# Altium PCB LED灯带-2835-30B-全限流-加定位点.PcbDoc (part 2 of 3)
Units mm, origin at the board's own origin, x right, y up, seen from the top; angles counter-clockwise.
Board outline 500 x 8 mm, 2 copper layers (Top Layer, Bottom Layer); 91 components, 0 nets, 184 pads, 0 vias.
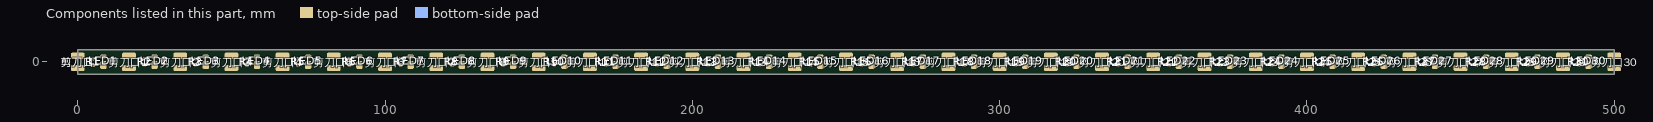
[diagram p2: the components of this part, seen from the top]

## Other copper
Top Layer:
  rectangle: 13.716,0.635 13.843,0.889
  rectangle: 13.462,1.397 14.224,2.921
  rectangle: 13.208,1.905 14.097,2.54
  rectangle: 10.541,1.778 11.43,2.794
  rectangle: 2.921,2.159 10.16,3.683
  region: 7.344,2.064 6.99,2.418 6.731,2.159 7.085,1.805
  rectangle: 6.985,1.143 7.366,2.54
  rectangle: 3.048,0.889 3.683,2.667
  region: 6.255,-3.153 6.609,-2.799 6.35,-2.54 5.996,-2.894
  rectangle: 5.842,-3.048 10.827,-2.767
  rectangle: 10.922,-3.175 11.557,-0.889
  region: 10.827,-3.026 11.181,-2.672 10.922,-2.413 10.568,-2.767
  rectangle: 0.259,-3.683 11.303,-2.794
  rectangle: 11.181,-3.683 16.764,-0.63
  region: 11.535,-0.984 11.181,-0.63 10.922,-0.889 11.276,-1.243
  region: 5.996,-1.243 6.35,-0.889 5.842,-0.381 5.488,-0.735
  region: 4.223,-0.994 4.577,-0.64 4.318,-0.381 3.964,-0.735
  rectangle: 0.259,-3.683 6.35,-0.889
  region: 3.329,2.386 3.683,2.032 3.942,2.291 3.588,2.645
  region: 3.07,0.984 3.424,0.63 3.683,0.889 3.329,1.243
  rectangle: 7.112,1.016 10.922,3.741
  rectangle: 0.259,2.286 16.637,3.741
  rectangle: 0.259,0.635 3.429,3.741
  rectangle: 10.033,-2.159 10.414,0.249
  region: 9.806,-2.059 10.16,-2.413 10.419,-2.154 10.065,-1.8
  region: 10.065,-0.105 10.419,0.249 10.16,0.508 9.806,0.154
  region: 7.339,-1.932 6.985,-2.286 7.112,-2.413 7.466,-2.059
  rectangle: 6.604,-0.254 8.001,0.508
  region: 6.001,1.165 6.355,1.519 6.096,1.778 5.742,1.424
  rectangle: 5.461,0.381 6.35,1.524
  rectangle: 5.789,0.762 5.969,1.778
  rectangle: 5.969,0.762 6.096,1.778
  rectangle: 0,0.635 3.429,3.741
  rectangle: 0,-3.683 4.318,-0.635
  rectangle: 13.462,-3.683 16.764,-0.635
  rectangle: 13.843,0.635 16.764,3.741
  rectangle: 6.985,-2.286 7.747,0.318
  rectangle: 7.112,-2.413 10.155,0.508
  region: 7.339,1.497 6.985,1.143 7.112,1.016 7.466,1.37
  rectangle: 7.112,1.016 10.414,2.286
  rectangle: 7.097,1.031 10.16,2.921
  region: 7.112,-0.762 7.62,-0.254 6.223,1.143 5.715,0.635
  rectangle: 4.191,0.508 4.672,1.651
  region: 4.45,1.392 4.577,1.519 4.318,1.778 4.191,1.651
  region: 4.672,0.989 4.191,0.508 4.318,0.381 4.799,0.862
  region: 4.223,-0.994 4.577,-0.64 4.318,-0.381 3.964,-0.735
  rectangle: 4.318,0.508 5.969,1.778
  rectangle: 4.318,0.381 5.789,0.762
  rectangle: 4.318,-3.048 5.842,-0.381
  region: 24.011,2.064 23.656,2.418 23.398,2.159 23.752,1.805
  rectangle: 23.652,1.143 24.033,2.54
  rectangle: 19.715,0.889 20.35,2.667
  region: 22.921,-3.153 23.275,-2.799 23.017,-2.54 22.663,-2.894
  rectangle: 22.509,-3.048 27.493,-2.767
  rectangle: 27.589,-3.175 28.224,-0.889
  region: 27.493,-3.026 27.847,-2.672 27.589,-2.413 27.235,-2.767
  rectangle: 16.926,-3.683 27.97,-2.794
  rectangle: 27.847,-3.683 33.431,-0.63
  region: 28.202,-0.984 27.847,-0.63 27.589,-0.889 27.943,-1.243
  region: 22.663,-1.243 23.017,-0.889 22.509,-0.381 22.155,-0.735
  region: 20.889,-0.994 21.243,-0.64 20.985,-0.381 20.631,-0.735
  rectangle: 16.926,-3.683 23.017,-0.889
  region: 19.996,2.386 20.35,2.032 20.608,2.291 20.254,2.645
  region: 26.763,1.333 27.462,0.635 27.72,0.894 27.022,1.592
  region: 19.737,0.984 20.091,0.63 20.35,0.889 19.996,1.243
  rectangle: 23.779,1.016 27.462,3.741
  rectangle: 27.462,0.635 33.304,3.741
  rectangle: 16.926,2.159 33.304,3.741
  rectangle: 16.926,0.635 20.096,3.741
  rectangle: 26.7,-2.159 27.081,0.249
  region: 26.473,-2.059 26.827,-2.413 27.085,-2.154 26.731,-1.8
  region: 26.731,-0.105 27.085,0.249 26.827,0.508 26.473,0.154
  region: 24.006,-1.932 23.652,-2.286 23.779,-2.413 24.133,-2.059
  rectangle: 23.271,-0.254 24.668,0.508
  region: 22.667,1.165 23.021,1.519 22.763,1.778 22.409,1.424
  rectangle: 22.128,0.381 23.017,1.524
  rectangle: 22.456,0.762 22.636,1.778
  rectangle: 22.636,0.762 22.763,1.778
  rectangle: 16.667,0.635 20.096,3.741
  rectangle: 16.667,-3.683 20.985,-0.635
  rectangle: 30.129,-3.683 33.431,-0.635
  rectangle: 30.51,0.635 33.431,3.741
  rectangle: 23.652,-2.286 24.414,0.318
  rectangle: 23.779,-2.413 26.822,0.508
  region: 24.006,1.497 23.652,1.143 23.779,1.016 24.133,1.37
  rectangle: 23.779,1.016 27.081,2.286
  rectangle: 23.763,1.031 26.827,2.921
  region: 23.779,-0.762 24.287,-0.254 22.89,1.143 22.382,0.635
  rectangle: 20.858,0.508 21.339,1.651
  region: 21.116,1.392 21.243,1.519 20.985,1.778 20.858,1.651
  region: 21.339,0.989 20.858,0.508 20.985,0.381 21.466,0.862
  region: 20.889,-0.994 21.243,-0.64 20.985,-0.381 20.631,-0.735
  rectangle: 20.985,0.508 22.636,1.778
  rectangle: 20.985,0.381 22.456,0.762
  rectangle: 20.985,-3.048 22.509,-0.381
  region: 40.677,2.064 40.323,2.418 40.064,2.159 40.418,1.805
  rectangle: 40.318,1.143 40.699,2.54
  rectangle: 36.381,0.889 37.016,2.667
  region: 39.588,-3.153 39.942,-2.799 39.683,-2.54 39.329,-2.894
  rectangle: 39.175,-3.048 44.16,-2.767
  rectangle: 44.255,-3.175 44.89,-0.889
  region: 44.16,-3.026 44.514,-2.672 44.255,-2.413 43.901,-2.767
  rectangle: 33.592,-3.683 44.636,-2.794
  rectangle: 44.514,-3.683 50.097,-0.63
  region: 44.868,-0.984 44.514,-0.63 44.255,-0.889 44.609,-1.243
  region: 39.329,-1.243 39.683,-0.889 39.175,-0.381 38.821,-0.735
  region: 37.556,-0.994 37.91,-0.64 37.651,-0.381 37.297,-0.735
  rectangle: 33.592,-3.683 39.683,-0.889
  region: 36.662,2.386 37.016,2.032 37.275,2.291 36.921,2.645
  region: 43.43,1.333 44.128,0.635 44.387,0.894 43.689,1.592
  region: 36.403,0.984 36.758,0.63 37.016,0.889 36.662,1.243
  rectangle: 40.445,1.016 44.128,3.741
  rectangle: 44.128,0.635 49.97,3.741
  rectangle: 33.592,2.159 49.97,3.741
  rectangle: 33.592,0.635 36.762,3.741
  rectangle: 43.366,-2.159 43.747,0.249
  region: 43.139,-2.059 43.493,-2.413 43.752,-2.154 43.398,-1.8
  region: 43.398,-0.105 43.752,0.249 43.493,0.508 43.139,0.154
  region: 40.672,-1.932 40.318,-2.286 40.445,-2.413 40.799,-2.059
  rectangle: 39.937,-0.254 41.334,0.508
  region: 39.334,1.165 39.688,1.519 39.429,1.778 39.075,1.424
  rectangle: 38.794,0.381 39.683,1.524
  rectangle: 39.122,0.762 39.302,1.778
  rectangle: 39.302,0.762 39.429,1.778
  rectangle: 33.333,0.635 36.762,3.741
  rectangle: 33.333,-3.683 37.651,-0.635
  rectangle: 46.795,-3.683 50.097,-0.635
  rectangle: 47.176,0.635 50.097,3.741
  rectangle: 40.318,-2.286 41.08,0.318
  rectangle: 40.445,-2.413 43.489,0.508
  region: 40.673,1.497 40.318,1.143 40.445,1.016 40.8,1.37
  rectangle: 40.445,1.016 43.747,2.286
  rectangle: 40.43,1.031 43.493,2.921
  region: 40.445,-0.762 40.953,-0.254 39.556,1.143 39.048,0.635
  rectangle: 37.524,0.508 38.005,1.651
  region: 37.783,1.392 37.91,1.519 37.651,1.778 37.524,1.651
  region: 38.005,0.989 37.524,0.508 37.651,0.381 38.132,0.862
  region: 37.556,-0.994 37.91,-0.64 37.651,-0.381 37.297,-0.735
  rectangle: 37.651,0.508 39.302,1.778
  rectangle: 37.651,0.381 39.122,0.762
  rectangle: 37.651,-3.048 39.175,-0.381
  region: 57.344,2.064 56.99,2.418 56.731,2.159 57.085,1.805
  rectangle: 56.985,1.143 57.366,2.54
  rectangle: 53.048,0.889 53.683,2.667
  region: 56.255,-3.153 56.609,-2.799 56.35,-2.54 55.996,-2.894
  rectangle: 55.842,-3.048 60.827,-2.767
  rectangle: 60.922,-3.175 61.557,-0.889
  region: 60.827,-3.026 61.181,-2.672 60.922,-2.413 60.568,-2.767
  rectangle: 50.259,-3.683 61.303,-2.794
  rectangle: 61.181,-3.683 66.764,-0.63
  region: 61.535,-0.984 61.181,-0.63 60.922,-0.889 61.276,-1.243
  region: 55.996,-1.243 56.35,-0.889 55.842,-0.381 55.488,-0.735
  region: 54.223,-0.994 54.577,-0.64 54.318,-0.381 53.964,-0.735
  rectangle: 50.259,-3.683 56.35,-0.889
  region: 53.329,2.386 53.683,2.032 53.942,2.291 53.588,2.645
  region: 60.097,1.333 60.795,0.635 61.054,0.894 60.355,1.592
  region: 53.07,0.984 53.424,0.63 53.683,0.889 53.329,1.243
  rectangle: 57.112,1.016 60.795,3.741
  rectangle: 60.795,0.635 66.637,3.741
  rectangle: 50.259,2.159 66.637,3.741
  rectangle: 50.259,0.635 53.429,3.741
  rectangle: 60.033,-2.159 60.414,0.249
  region: 59.806,-2.059 60.16,-2.413 60.419,-2.154 60.065,-1.8
  region: 60.065,-0.105 60.419,0.249 60.16,0.508 59.806,0.154
  region: 57.339,-1.932 56.985,-2.286 57.112,-2.413 57.466,-2.059
  rectangle: 56.604,-0.254 58.001,0.508
  region: 56.001,1.165 56.355,1.519 56.096,1.778 55.742,1.424
  rectangle: 55.461,0.381 56.35,1.524
  rectangle: 55.789,0.762 55.969,1.778
  rectangle: 55.969,0.762 56.096,1.778
  rectangle: 50,0.635 53.429,3.741
  rectangle: 50,-3.683 54.318,-0.635
  rectangle: 63.462,-3.683 66.764,-0.635
  rectangle: 63.843,0.635 66.764,3.741
  rectangle: 56.985,-2.286 57.747,0.318
  rectangle: 57.112,-2.413 60.155,0.508
  region: 57.339,1.497 56.985,1.143 57.112,1.016 57.466,1.37
  rectangle: 57.112,1.016 60.414,2.286
  rectangle: 57.097,1.031 60.16,2.921
  region: 57.112,-0.762 57.62,-0.254 56.223,1.143 55.715,0.635
  rectangle: 54.191,0.508 54.672,1.651
  region: 54.45,1.392 54.577,1.519 54.318,1.778 54.191,1.651
  region: 54.672,0.989 54.191,0.508 54.318,0.381 54.799,0.862
  region: 54.223,-0.994 54.577,-0.64 54.318,-0.381 53.964,-0.735
  rectangle: 54.318,0.508 55.969,1.778
  rectangle: 54.318,0.381 55.789,0.762
  rectangle: 54.318,-3.048 55.842,-0.381
  region: 74.011,2.064 73.656,2.418 73.398,2.159 73.752,1.805
  rectangle: 73.652,1.143 74.033,2.54
  rectangle: 69.715,0.889 70.35,2.667
  region: 72.921,-3.153 73.275,-2.799 73.017,-2.54 72.663,-2.894
  rectangle: 72.509,-3.048 77.493,-2.767
  rectangle: 77.589,-3.175 78.224,-0.889
  region: 77.493,-3.026 77.847,-2.672 77.589,-2.413 77.235,-2.767
  rectangle: 66.926,-3.683 77.97,-2.794
  rectangle: 77.847,-3.683 83.431,-0.63
  region: 78.202,-0.984 77.847,-0.63 77.589,-0.889 77.943,-1.243
  region: 72.663,-1.243 73.017,-0.889 72.509,-0.381 72.155,-0.735
  region: 70.889,-0.994 71.243,-0.64 70.985,-0.381 70.631,-0.735
  rectangle: 66.926,-3.683 73.017,-0.889
  region: 69.996,2.386 70.35,2.032 70.608,2.291 70.254,2.645
  region: 76.763,1.333 77.462,0.635 77.72,0.894 77.022,1.592
  region: 69.737,0.984 70.091,0.63 70.35,0.889 69.996,1.243
  rectangle: 73.779,1.016 77.462,3.741
  rectangle: 77.462,0.635 83.304,3.741
  rectangle: 66.926,2.159 83.304,3.741
  rectangle: 66.926,0.635 70.096,3.741
  rectangle: 76.7,-2.159 77.081,0.249
  region: 76.473,-2.059 76.827,-2.413 77.085,-2.154 76.731,-1.8
  region: 76.731,-0.105 77.085,0.249 76.827,0.508 76.473,0.154
  region: 74.006,-1.932 73.652,-2.286 73.779,-2.413 74.133,-2.059
  rectangle: 73.271,-0.254 74.668,0.508
  region: 72.667,1.165 73.021,1.519 72.763,1.778 72.409,1.424
  rectangle: 72.128,0.381 73.017,1.524
  rectangle: 72.456,0.762 72.636,1.778
  rectangle: 72.636,0.762 72.763,1.778
  rectangle: 66.667,0.635 70.096,3.741
  rectangle: 66.667,-3.683 70.985,-0.635
  rectangle: 80.129,-3.683 83.431,-0.635
  rectangle: 80.51,0.635 83.431,3.741
  rectangle: 73.652,-2.286 74.414,0.318
  rectangle: 73.779,-2.413 76.822,0.508
  region: 74.006,1.497 73.652,1.143 73.779,1.016 74.133,1.37
  rectangle: 73.779,1.016 77.081,2.286
  rectangle: 73.763,1.031 76.827,2.921
  region: 73.779,-0.762 74.287,-0.254 72.89,1.143 72.382,0.635
  rectangle: 70.858,0.508 71.339,1.651
  region: 71.116,1.392 71.243,1.519 70.985,1.778 70.858,1.651
  region: 71.339,0.989 70.858,0.508 70.985,0.381 71.466,0.862
  region: 70.889,-0.994 71.243,-0.64 70.985,-0.381 70.631,-0.735
  rectangle: 70.985,0.508 72.636,1.778
  rectangle: 70.985,0.381 72.456,0.762
  rectangle: 70.985,-3.048 72.509,-0.381
  region: 90.677,2.064 90.323,2.418 90.064,2.159 90.419,1.805
  rectangle: 90.318,1.143 90.699,2.54
  rectangle: 86.381,0.889 87.016,2.667
  region: 89.588,-3.153 89.942,-2.799 89.683,-2.54 89.329,-2.894
  rectangle: 89.175,-3.048 94.16,-2.767
  rectangle: 94.255,-3.175 94.89,-0.889
  region: 94.16,-3.026 94.514,-2.672 94.255,-2.413 93.901,-2.767
  rectangle: 83.592,-3.683 94.636,-2.794
  rectangle: 94.514,-3.683 100.097,-0.63
  region: 94.868,-0.984 94.514,-0.63 94.255,-0.889 94.61,-1.243
  region: 89.329,-1.243 89.683,-0.889 89.175,-0.381 88.821,-0.735
  region: 87.556,-0.994 87.91,-0.64 87.651,-0.381 87.297,-0.735
  rectangle: 83.592,-3.683 89.683,-0.889
  region: 86.662,2.386 87.016,2.032 87.275,2.291 86.921,2.645
  region: 93.43,1.333 94.128,0.635 94.387,0.894 93.689,1.592
  region: 86.403,0.984 86.758,0.63 87.016,0.889 86.662,1.243
  rectangle: 90.445,1.016 94.128,3.741
  rectangle: 94.128,0.635 99.97,3.741
  rectangle: 83.592,2.159 99.97,3.741
  rectangle: 83.592,0.635 86.762,3.741
  rectangle: 93.366,-2.159 93.747,0.249
  region: 93.139,-2.059 93.493,-2.413 93.752,-2.154 93.398,-1.8
  region: 93.398,-0.105 93.752,0.249 93.493,0.508 93.139,0.154
  region: 90.673,-1.932 90.318,-2.286 90.445,-2.413 90.8,-2.059
  rectangle: 89.937,-0.254 91.334,0.508
  region: 89.334,1.165 89.688,1.519 89.429,1.778 89.075,1.424
  rectangle: 88.794,0.381 89.683,1.524
  rectangle: 89.122,0.762 89.302,1.778
  rectangle: 89.302,0.762 89.429,1.778
  rectangle: 83.333,0.635 86.762,3.741
  rectangle: 83.333,-3.683 87.651,-0.635
  rectangle: 96.795,-3.683 100.097,-0.635
  rectangle: 97.176,0.635 100.097,3.741
  rectangle: 90.318,-2.286 91.08,0.318
  rectangle: 90.445,-2.413 93.489,0.508
  region: 90.673,1.497 90.318,1.143 90.445,1.016 90.8,1.37
  rectangle: 90.445,1.016 93.747,2.286
  rectangle: 90.43,1.031 93.493,2.921
  region: 90.445,-0.762 90.953,-0.254 89.556,1.143 89.048,0.635
  rectangle: 87.524,0.508 88.006,1.651
  region: 87.783,1.392 87.91,1.519 87.651,1.778 87.524,1.651
  region: 88.006,0.989 87.524,0.508 87.651,0.381 88.133,0.862
  region: 87.556,-0.994 87.91,-0.64 87.651,-0.381 87.297,-0.735
  rectangle: 87.651,0.508 89.302,1.778
  rectangle: 87.651,0.381 89.122,0.762
  rectangle: 87.651,-3.048 89.175,-0.381
  region: 107.344,2.064 106.99,2.418 106.731,2.159 107.085,1.805
  rectangle: 106.985,1.143 107.366,2.54
  rectangle: 103.048,0.889 103.683,2.667
  region: 106.255,-3.153 106.609,-2.799 106.35,-2.54 105.996,-2.894
  rectangle: 105.842,-3.048 110.827,-2.767
  rectangle: 110.922,-3.175 111.557,-0.889
  region: 110.827,-3.026 111.181,-2.672 110.922,-2.413 110.568,-2.767
  rectangle: 100.259,-3.683 111.303,-2.794
  rectangle: 111.181,-3.683 116.764,-0.63
  region: 111.535,-0.984 111.181,-0.63 110.922,-0.889 111.276,-1.243
  region: 105.996,-1.243 106.35,-0.889 105.842,-0.381 105.488,-0.735
  region: 104.223,-0.994 104.577,-0.64 104.318,-0.381 103.964,-0.735
  rectangle: 100.259,-3.683 106.35,-0.889
  region: 103.329,2.386 103.683,2.032 103.942,2.291 103.588,2.645
  region: 110.097,1.333 110.795,0.635 111.054,0.894 110.355,1.592
  region: 103.07,0.984 103.424,0.63 103.683,0.889 103.329,1.243
  rectangle: 107.112,1.016 110.795,3.741
  rectangle: 110.795,0.635 116.637,3.741
  rectangle: 100.259,2.159 116.637,3.741
  rectangle: 100.259,0.635 103.429,3.741
  rectangle: 110.033,-2.159 110.414,0.249
  region: 109.806,-2.059 110.16,-2.413 110.419,-2.154 110.065,-1.8
  region: 110.065,-0.105 110.419,0.249 110.16,0.508 109.806,0.154
  region: 107.339,-1.932 106.985,-2.286 107.112,-2.413 107.466,-2.059
  rectangle: 106.604,-0.254 108.001,0.508
  region: 106.001,1.165 106.355,1.519 106.096,1.778 105.742,1.424
  rectangle: 105.461,0.381 106.35,1.524
  rectangle: 105.789,0.762 105.969,1.778
  rectangle: 105.969,0.762 106.096,1.778
  rectangle: 100,0.635 103.429,3.741
  rectangle: 100,-3.683 104.318,-0.635
  rectangle: 113.462,-3.683 116.764,-0.635
  rectangle: 113.843,0.635 116.764,3.741
  rectangle: 106.985,-2.286 107.747,0.318
  rectangle: 107.112,-2.413 110.155,0.508
  region: 107.339,1.497 106.985,1.143 107.112,1.016 107.466,1.37
  rectangle: 107.112,1.016 110.414,2.286
  rectangle: 107.097,1.031 110.16,2.921
  region: 107.112,-0.762 107.62,-0.254 106.223,1.143 105.715,0.635
  rectangle: 104.191,0.508 104.672,1.651
  region: 104.45,1.392 104.577,1.519 104.318,1.778 104.191,1.651
  region: 104.672,0.989 104.191,0.508 104.318,0.381 104.799,0.862
  region: 104.223,-0.994 104.577,-0.64 104.318,-0.381 103.964,-0.735
  rectangle: 104.318,0.508 105.969,1.778
  rectangle: 104.318,0.381 105.789,0.762
  rectangle: 104.318,-3.048 105.842,-0.381
  region: 124.011,2.064 123.656,2.418 123.398,2.159 123.752,1.805
  rectangle: 123.652,1.143 124.033,2.54
  rectangle: 119.715,0.889 120.35,2.667
  region: 122.921,-3.153 123.275,-2.799 123.017,-2.54 122.663,-2.894
  rectangle: 122.509,-3.048 127.493,-2.767
  rectangle: 127.589,-3.175 128.224,-0.889
  region: 127.493,-3.026 127.847,-2.672 127.589,-2.413 127.235,-2.767
  rectangle: 116.926,-3.683 127.97,-2.794
  rectangle: 127.847,-3.683 133.431,-0.63
  region: 128.202,-0.984 127.847,-0.63 127.589,-0.889 127.943,-1.243
  region: 122.663,-1.243 123.017,-0.889 122.509,-0.381 122.155,-0.735
  region: 120.889,-0.994 121.243,-0.64 120.985,-0.381 120.631,-0.735
  rectangle: 116.926,-3.683 123.017,-0.889
  region: 119.996,2.386 120.35,2.032 120.608,2.291 120.254,2.645
  region: 126.763,1.333 127.462,0.635 127.72,0.894 127.022,1.592
  region: 119.737,0.984 120.091,0.63 120.35,0.889 119.996,1.243
  rectangle: 123.779,1.016 127.462,3.741
  rectangle: 127.462,0.635 133.304,3.741
  rectangle: 116.926,2.159 133.304,3.741
  rectangle: 116.926,0.635 120.096,3.741
  rectangle: 126.7,-2.159 127.081,0.249
  region: 126.473,-2.059 126.827,-2.413 127.085,-2.154 126.731,-1.8
  region: 126.731,-0.105 127.085,0.249 126.827,0.508 126.473,0.154
  region: 124.006,-1.932 123.652,-2.286 123.779,-2.413 124.133,-2.059
  rectangle: 123.271,-0.254 124.668,0.508
  region: 122.667,1.165 123.021,1.519 122.763,1.778 122.409,1.424
  rectangle: 122.128,0.381 123.017,1.524
  rectangle: 122.456,0.762 122.636,1.778
  rectangle: 122.636,0.762 122.763,1.778
  rectangle: 116.667,0.635 120.096,3.741
  rectangle: 116.667,-3.683 120.985,-0.635
  rectangle: 130.129,-3.683 133.431,-0.635
  rectangle: 130.51,0.635 133.431,3.741
  rectangle: 123.652,-2.286 124.414,0.318
  rectangle: 123.779,-2.413 126.822,0.508
  region: 124.006,1.497 123.652,1.143 123.779,1.016 124.133,1.37
  rectangle: 123.779,1.016 127.081,2.286
  rectangle: 123.763,1.031 126.827,2.921
  region: 123.779,-0.762 124.287,-0.254 122.89,1.143 122.382,0.635
  rectangle: 120.858,0.508 121.339,1.651
  region: 121.116,1.392 121.243,1.519 120.985,1.778 120.858,1.651
  region: 121.339,0.989 120.858,0.508 120.985,0.381 121.466,0.862
  region: 120.889,-0.994 121.243,-0.64 120.985,-0.381 120.631,-0.735
  rectangle: 120.985,0.508 122.636,1.778
  rectangle: 120.985,0.381 122.456,0.762
  rectangle: 120.985,-3.048 122.509,-0.381
  region: 140.677,2.064 140.323,2.418 140.064,2.159 140.419,1.805
  rectangle: 140.318,1.143 140.699,2.54
  rectangle: 136.381,0.889 137.016,2.667
  region: 139.588,-3.153 139.942,-2.799 139.683,-2.54 139.329,-2.894
  rectangle: 139.175,-3.048 144.16,-2.767
  rectangle: 144.255,-3.175 144.89,-0.889
  region: 144.16,-3.026 144.514,-2.672 144.255,-2.413 143.901,-2.767
  rectangle: 133.592,-3.683 144.636,-2.794
  rectangle: 144.514,-3.683 150.097,-0.63
  region: 144.868,-0.984 144.514,-0.63 144.255,-0.889 144.61,-1.243
  region: 139.329,-1.243 139.683,-0.889 139.175,-0.381 138.821,-0.735
  region: 137.556,-0.994 137.91,-0.64 137.651,-0.381 137.297,-0.735
  rectangle: 133.592,-3.683 139.683,-0.889
  region: 136.662,2.386 137.016,2.032 137.275,2.291 136.921,2.645
  region: 143.43,1.333 144.128,0.635 144.387,0.894 143.689,1.592
  region: 136.403,0.984 136.758,0.63 137.016,0.889 136.662,1.243
  rectangle: 140.445,1.016 144.128,3.741
  rectangle: 144.128,0.635 149.97,3.741
  rectangle: 133.592,2.159 149.97,3.741
  rectangle: 133.592,0.635 136.762,3.741
  rectangle: 143.366,-2.159 143.747,0.249
  region: 143.139,-2.059 143.493,-2.413 143.752,-2.154 143.398,-1.8
  region: 143.398,-0.105 143.752,0.249 143.493,0.508 143.139,0.154
  region: 140.673,-1.932 140.318,-2.286 140.445,-2.413 140.8,-2.059
  rectangle: 139.937,-0.254 141.334,0.508
  region: 139.334,1.165 139.688,1.519 139.429,1.778 139.075,1.424
  rectangle: 138.794,0.381 139.683,1.524
  rectangle: 139.122,0.762 139.302,1.778
  rectangle: 139.302,0.762 139.429,1.778
  rectangle: 133.333,0.635 136.762,3.741
  rectangle: 133.333,-3.683 137.651,-0.635
  rectangle: 146.795,-3.683 150.097,-0.635
  rectangle: 147.176,0.635 150.097,3.741
  rectangle: 140.318,-2.286 141.08,0.318
  rectangle: 140.445,-2.413 143.489,0.508
  region: 140.673,1.497 140.318,1.143 140.445,1.016 140.8,1.37
  rectangle: 140.445,1.016 143.747,2.286
  rectangle: 140.43,1.031 143.493,2.921
  region: 140.445,-0.762 140.953,-0.254 139.556,1.143 139.048,0.635
  rectangle: 137.524,0.508 138.006,1.651
  region: 137.783,1.392 137.91,1.519 137.651,1.778 137.524,1.651
  region: 138.006,0.989 137.524,0.508 137.651,0.381 138.133,0.862
  region: 137.556,-0.994 137.91,-0.64 137.651,-0.381 137.297,-0.735
  rectangle: 137.651,0.508 139.302,1.778
  rectangle: 137.651,0.381 139.122,0.762
  rectangle: 137.651,-3.048 139.175,-0.381
  region: 157.344,2.064 156.99,2.418 156.731,2.159 157.085,1.805
  rectangle: 156.985,1.143 157.366,2.54
  rectangle: 153.048,0.889 153.683,2.667
  region: 156.255,-3.153 156.609,-2.799 156.35,-2.54 155.996,-2.894
  rectangle: 155.842,-3.048 160.827,-2.767
  rectangle: 160.922,-3.175 161.557,-0.889
  region: 160.827,-3.026 161.181,-2.672 160.922,-2.413 160.568,-2.767
  rectangle: 150.259,-3.683 161.303,-2.794
  rectangle: 161.181,-3.683 166.764,-0.63
  region: 161.535,-0.984 161.181,-0.63 160.922,-0.889 161.276,-1.243
  region: 155.996,-1.243 156.35,-0.889 155.842,-0.381 155.488,-0.735
  region: 154.223,-0.994 154.577,-0.64 154.318,-0.381 153.964,-0.735
  rectangle: 150.259,-3.683 156.35,-0.889
  region: 153.329,2.386 153.683,2.032 153.942,2.291 153.588,2.645
  region: 160.097,1.333 160.795,0.635 161.054,0.894 160.355,1.592
  region: 153.07,0.984 153.424,0.63 153.683,0.889 153.329,1.243
  rectangle: 157.112,1.016 160.795,3.741
  rectangle: 160.795,0.635 166.637,3.741
  rectangle: 150.259,2.159 166.637,3.741
  rectangle: 150.259,0.635 153.429,3.741
  rectangle: 160.033,-2.159 160.414,0.249
  region: 159.806,-2.059 160.16,-2.413 160.419,-2.154 160.065,-1.8
  region: 160.065,-0.105 160.419,0.249 160.16,0.508 159.806,0.154
  region: 157.339,-1.932 156.985,-2.286 157.112,-2.413 157.466,-2.059
  rectangle: 156.604,-0.254 158.001,0.508
  region: 156.001,1.165 156.355,1.519 156.096,1.778 155.742,1.424
  rectangle: 155.461,0.381 156.35,1.524
  rectangle: 155.789,0.762 155.969,1.778
  rectangle: 155.969,0.762 156.096,1.778
  rectangle: 150,0.635 153.429,3.741
  rectangle: 150,-3.683 154.318,-0.635
  rectangle: 163.462,-3.683 166.764,-0.635
  rectangle: 163.843,0.635 166.764,3.741
  rectangle: 156.985,-2.286 157.747,0.318
  rectangle: 157.112,-2.413 160.155,0.508
  region: 157.339,1.497 156.985,1.143 157.112,1.016 157.466,1.37
  rectangle: 157.112,1.016 160.414,2.286
  rectangle: 157.097,1.031 160.16,2.921
  region: 157.112,-0.762 157.62,-0.254 156.223,1.143 155.715,0.635
  rectangle: 154.191,0.508 154.672,1.651
  region: 154.45,1.392 154.577,1.519 154.318,1.778 154.191,1.651
  region: 154.672,0.989 154.191,0.508 154.318,0.381 154.799,0.862
  region: 154.223,-0.994 154.577,-0.64 154.318,-0.381 153.964,-0.735
  rectangle: 154.318,0.508 155.969,1.778
  rectangle: 154.318,0.381 155.789,0.762
  rectangle: 154.318,-3.048 155.842,-0.381
  region: 174.011,2.064 173.657,2.418 173.398,2.159 173.752,1.805
  rectangle: 173.652,1.143 174.033,2.54
  rectangle: 169.715,0.889 170.35,2.667
  region: 172.921,-3.153 173.276,-2.799 173.017,-2.54 172.663,-2.894
  rectangle: 172.509,-3.048 177.493,-2.767
  rectangle: 177.589,-3.175 178.224,-0.889
  region: 177.493,-3.026 177.848,-2.672 177.589,-2.413 177.235,-2.767
  rectangle: 166.926,-3.683 177.97,-2.794
  rectangle: 177.848,-3.683 183.431,-0.63
  region: 178.202,-0.984 177.848,-0.63 177.589,-0.889 177.943,-1.243
  region: 172.663,-1.243 173.017,-0.889 172.509,-0.381 172.155,-0.735
  region: 170.889,-0.994 171.244,-0.64 170.985,-0.381 170.631,-0.735
  rectangle: 166.926,-3.683 173.017,-0.889
  region: 169.996,2.386 170.35,2.032 170.609,2.291 170.254,2.645
  region: 176.763,1.333 177.462,0.635 177.72,0.894 177.022,1.592
  region: 169.737,0.984 170.091,0.63 170.35,0.889 169.996,1.243
  rectangle: 173.779,1.016 177.462,3.741
  rectangle: 177.462,0.635 183.304,3.741
  rectangle: 166.926,2.159 183.304,3.741
  rectangle: 166.926,0.635 170.096,3.741
  rectangle: 176.7,-2.159 177.081,0.249
  region: 176.473,-2.059 176.827,-2.413 177.086,-2.154 176.731,-1.8
  region: 176.731,-0.105 177.086,0.249 176.827,0.508 176.473,0.154
  region: 174.006,-1.932 173.652,-2.286 173.779,-2.413 174.133,-2.059
  rectangle: 173.271,-0.254 174.668,0.508
  region: 172.667,1.165 173.022,1.519 172.763,1.778 172.409,1.424
  rectangle: 172.128,0.381 173.017,1.524
  rectangle: 172.456,0.762 172.636,1.778
  rectangle: 172.636,0.762 172.763,1.778
  rectangle: 166.667,0.635 170.096,3.741
  rectangle: 166.667,-3.683 170.985,-0.635
  rectangle: 180.129,-3.683 183.431,-0.635
  rectangle: 180.51,0.635 183.431,3.741
  rectangle: 173.652,-2.286 174.414,0.318
  rectangle: 173.779,-2.413 176.822,0.508
  region: 174.006,1.497 173.652,1.143 173.779,1.016 174.133,1.37
  rectangle: 173.779,1.016 177.081,2.286
  rectangle: 173.763,1.031 176.827,2.921
  region: 173.779,-0.762 174.287,-0.254 172.89,1.143 172.382,0.635
  rectangle: 170.858,0.508 171.339,1.651
  region: 171.117,1.392 171.244,1.519 170.985,1.778 170.858,1.651
  region: 171.339,0.989 170.858,0.508 170.985,0.381 171.466,0.862
  region: 170.889,-0.994 171.244,-0.64 170.985,-0.381 170.631,-0.735
  rectangle: 170.985,0.508 172.636,1.778
  rectangle: 170.985,0.381 172.456,0.762
  rectangle: 170.985,-3.048 172.509,-0.381
  region: 190.677,2.064 190.323,2.418 190.064,2.159 190.419,1.805
  rectangle: 190.318,1.143 190.699,2.54
  rectangle: 186.381,0.889 187.016,2.667
  region: 189.588,-3.153 189.942,-2.799 189.683,-2.54 189.329,-2.894
  rectangle: 189.175,-3.048 194.16,-2.767
  rectangle: 194.255,-3.175 194.89,-0.889
  region: 194.16,-3.026 194.514,-2.672 194.255,-2.413 193.901,-2.767
  rectangle: 183.592,-3.683 194.636,-2.794
  rectangle: 194.514,-3.683 200.097,-0.63
  region: 194.868,-0.984 194.514,-0.63 194.255,-0.889 194.61,-1.243
  region: 189.329,-1.243 189.683,-0.889 189.175,-0.381 188.821,-0.735
  region: 187.556,-0.994 187.91,-0.64 187.651,-0.381 187.297,-0.735
  rectangle: 183.592,-3.683 189.683,-0.889
  region: 186.662,2.386 187.016,2.032 187.275,2.291 186.921,2.645
  region: 193.43,1.333 194.128,0.635 194.387,0.894 193.689,1.592
  region: 186.403,0.984 186.758,0.63 187.016,0.889 186.662,1.243
  rectangle: 190.445,1.016 194.128,3.741
  rectangle: 194.128,0.635 199.97,3.741
  rectangle: 183.592,2.159 199.97,3.741
  rectangle: 183.592,0.635 186.762,3.741
  rectangle: 193.366,-2.159 193.747,0.249
  region: 193.139,-2.059 193.493,-2.413 193.752,-2.154 193.398,-1.8
  region: 193.398,-0.105 193.752,0.249 193.493,0.508 193.139,0.154
  region: 190.673,-1.932 190.318,-2.286 190.445,-2.413 190.8,-2.059
  rectangle: 189.937,-0.254 191.334,0.508
  region: 189.334,1.165 189.688,1.519 189.429,1.778 189.075,1.424
  rectangle: 188.794,0.381 189.683,1.524
  rectangle: 189.122,0.762 189.302,1.778
  rectangle: 189.302,0.762 189.429,1.778
  rectangle: 183.333,0.635 186.762,3.741
  rectangle: 183.333,-3.683 187.651,-0.635
  rectangle: 196.795,-3.683 200.097,-0.635
  rectangle: 197.176,0.635 200.097,3.741
  rectangle: 190.318,-2.286 191.08,0.318
  rectangle: 190.445,-2.413 193.489,0.508
  region: 190.673,1.497 190.318,1.143 190.445,1.016 190.8,1.37
  rectangle: 190.445,1.016 193.747,2.286
  rectangle: 190.43,1.031 193.493,2.921
  region: 190.445,-0.762 190.953,-0.254 189.556,1.143 189.048,0.635
  rectangle: 187.524,0.508 188.006,1.651
  region: 187.783,1.392 187.91,1.519 187.651,1.778 187.524,1.651
  region: 188.006,0.989 187.524,0.508 187.651,0.381 188.133,0.862
  region: 187.556,-0.994 187.91,-0.64 187.651,-0.381 187.297,-0.735
  rectangle: 187.651,0.508 189.302,1.778
  rectangle: 187.651,0.381 189.122,0.762
  rectangle: 187.651,-3.048 189.175,-0.381
  region: 207.344,2.064 206.99,2.418 206.731,2.159 207.085,1.805
  rectangle: 206.985,1.143 207.366,2.54
  rectangle: 203.048,0.889 203.683,2.667
  region: 206.255,-3.153 206.609,-2.799 206.35,-2.54 205.996,-2.894
  rectangle: 205.842,-3.048 210.827,-2.767
  rectangle: 210.922,-3.175 211.557,-0.889
  region: 210.827,-3.026 211.181,-2.672 210.922,-2.413 210.568,-2.767
  rectangle: 200.259,-3.683 211.303,-2.794
  rectangle: 211.181,-3.683 216.764,-0.63
  region: 211.535,-0.984 211.181,-0.63 210.922,-0.889 211.276,-1.243
  region: 205.996,-1.243 206.35,-0.889 205.842,-0.381 205.488,-0.735
  region: 204.223,-0.994 204.577,-0.64 204.318,-0.381 203.964,-0.735
  rectangle: 200.259,-3.683 206.35,-0.889
  region: 203.329,2.386 203.683,2.032 203.942,2.291 203.588,2.645
  region: 210.097,1.333 210.795,0.635 211.054,0.894 210.355,1.592
  region: 203.07,0.984 203.424,0.63 203.683,0.889 203.329,1.243
  rectangle: 207.112,1.016 210.795,3.741
  rectangle: 210.795,0.635 216.637,3.741
  rectangle: 200.259,2.159 216.637,3.741
  rectangle: 200.259,0.635 203.429,3.741
  rectangle: 210.033,-2.159 210.414,0.249
  region: 209.806,-2.059 210.16,-2.413 210.419,-2.154 210.065,-1.8
  region: 210.065,-0.105 210.419,0.249 210.16,0.508 209.806,0.154
  region: 207.339,-1.932 206.985,-2.286 207.112,-2.413 207.466,-2.059
  rectangle: 206.604,-0.254 208.001,0.508
  region: 206.001,1.165 206.355,1.519 206.096,1.778 205.742,1.424
  rectangle: 205.461,0.381 206.35,1.524
  rectangle: 205.789,0.762 205.969,1.778
  rectangle: 205.969,0.762 206.096,1.778
  rectangle: 200,0.635 203.429,3.741
  rectangle: 200,-3.683 204.318,-0.635
  rectangle: 213.462,-3.683 216.764,-0.635
  rectangle: 213.843,0.635 216.764,3.741
  rectangle: 206.985,-2.286 207.747,0.318
  rectangle: 207.112,-2.413 210.155,0.508
  region: 207.339,1.497 206.985,1.143 207.112,1.016 207.466,1.37
  rectangle: 207.112,1.016 210.414,2.286
  rectangle: 207.097,1.031 210.16,2.921
  region: 207.112,-0.762 207.62,-0.254 206.223,1.143 205.715,0.635
  rectangle: 204.191,0.508 204.672,1.651
  region: 204.45,1.392 204.577,1.519 204.318,1.778 204.191,1.651
  region: 204.672,0.989 204.191,0.508 204.318,0.381 204.799,0.862
  region: 204.223,-0.994 204.577,-0.64 204.318,-0.381 203.964,-0.735
  rectangle: 204.318,0.508 205.969,1.778
  rectangle: 204.318,0.381 205.789,0.762
  rectangle: 204.318,-3.048 205.842,-0.381
  region: 224.011,2.064 223.657,2.418 223.398,2.159 223.752,1.805
  rectangle: 223.652,1.143 224.033,2.54
  rectangle: 219.715,0.889 220.35,2.667
  region: 222.921,-3.153 223.276,-2.799 223.017,-2.54 222.663,-2.894
  rectangle: 222.509,-3.048 227.493,-2.767
  rectangle: 227.589,-3.175 228.224,-0.889
  region: 227.493,-3.026 227.848,-2.672 227.589,-2.413 227.235,-2.767
  rectangle: 216.926,-3.683 227.97,-2.794
  rectangle: 227.848,-3.683 233.431,-0.63
  region: 228.202,-0.984 227.848,-0.63 227.589,-0.889 227.943,-1.243
  region: 222.663,-1.243 223.017,-0.889 222.509,-0.381 222.155,-0.735
  region: 220.889,-0.994 221.244,-0.64 220.985,-0.381 220.631,-0.735
  rectangle: 216.926,-3.683 223.017,-0.889
  region: 219.996,2.386 220.35,2.032 220.609,2.291 220.254,2.645
  region: 226.763,1.333 227.462,0.635 227.721,0.894 227.022,1.592
  region: 219.737,0.984 220.091,0.63 220.35,0.889 219.996,1.243
  rectangle: 223.779,1.016 227.462,3.741
  rectangle: 227.462,0.635 233.304,3.741
  rectangle: 216.926,2.159 233.304,3.741
  rectangle: 216.926,0.635 220.096,3.741
  rectangle: 226.7,-2.159 227.081,0.249
  region: 226.473,-2.059 226.827,-2.413 227.086,-2.154 226.731,-1.8
  region: 226.731,-0.105 227.086,0.249 226.827,0.508 226.473,0.154
  region: 224.006,-1.932 223.652,-2.286 223.779,-2.413 224.133,-2.059
  rectangle: 223.271,-0.254 224.668,0.508
  region: 222.667,1.165 223.022,1.519 222.763,1.778 222.409,1.424
  rectangle: 222.128,0.381 223.017,1.524
  rectangle: 222.456,0.762 222.636,1.778
  rectangle: 222.636,0.762 222.763,1.778
  rectangle: 216.667,0.635 220.096,3.741
  rectangle: 216.667,-3.683 220.985,-0.635
  rectangle: 230.129,-3.683 233.431,-0.635
  rectangle: 230.51,0.635 233.431,3.741
  rectangle: 223.652,-2.286 224.414,0.318
  rectangle: 223.779,-2.413 226.822,0.508
  region: 224.006,1.497 223.652,1.143 223.779,1.016 224.133,1.37
  rectangle: 223.779,1.016 227.081,2.286
  rectangle: 223.763,1.031 226.827,2.921
  region: 223.779,-0.762 224.287,-0.254 222.89,1.143 222.382,0.635
  rectangle: 220.858,0.508 221.339,1.651
  region: 221.117,1.392 221.244,1.519 220.985,1.778 220.858,1.651
  region: 221.339,0.989 220.858,0.508 220.985,0.381 221.466,0.862
  region: 220.889,-0.994 221.244,-0.64 220.985,-0.381 220.631,-0.735
  rectangle: 220.985,0.508 222.636,1.778
  rectangle: 220.985,0.381 222.456,0.762
  rectangle: 220.985,-3.048 222.509,-0.381
  region: 240.677,2.064 240.323,2.418 240.064,2.159 240.419,1.805
  rectangle: 240.318,1.143 240.699,2.54
  rectangle: 236.381,0.889 237.016,2.667
  region: 239.588,-3.153 239.942,-2.799 239.683,-2.54 239.329,-2.894
  rectangle: 239.175,-3.048 244.16,-2.767
  rectangle: 244.255,-3.175 244.89,-0.889
  region: 244.16,-3.026 244.514,-2.672 244.255,-2.413 243.901,-2.767
  rectangle: 233.592,-3.683 244.636,-2.794
  rectangle: 244.514,-3.683 250.097,-0.63
  region: 244.868,-0.984 244.514,-0.63 244.255,-0.889 244.61,-1.243
  region: 239.329,-1.243 239.683,-0.889 239.175,-0.381 238.821,-0.735
  region: 237.556,-0.994 237.91,-0.64 237.651,-0.381 237.297,-0.735
  rectangle: 233.592,-3.683 239.683,-0.889
  region: 236.662,2.386 237.016,2.032 237.275,2.291 236.921,2.645
  region: 243.43,1.333 244.128,0.635 244.387,0.894 243.689,1.592
  region: 236.403,0.984 236.758,0.63 237.016,0.889 236.662,1.243
  rectangle: 240.445,1.016 244.128,3.741
  rectangle: 244.128,0.635 249.97,3.741
  rectangle: 233.592,2.159 249.97,3.741
  rectangle: 233.592,0.635 236.762,3.741
  rectangle: 243.366,-2.159 243.747,0.249
  region: 243.139,-2.059 243.493,-2.413 243.752,-2.154 243.398,-1.8
  region: 243.398,-0.105 243.752,0.249 243.493,0.508 243.139,0.154
  region: 240.673,-1.932 240.318,-2.286 240.445,-2.413 240.8,-2.059
  rectangle: 239.937,-0.254 241.334,0.508
  region: 239.334,1.165 239.688,1.519 239.429,1.778 239.075,1.424
  rectangle: 238.794,0.381 239.683,1.524
  rectangle: 239.122,0.762 239.302,1.778
  rectangle: 239.302,0.762 239.429,1.778
  rectangle: 233.333,0.635 236.762,3.741
  rectangle: 233.333,-3.683 237.651,-0.635
  rectangle: 246.795,-3.683 250.097,-0.635
  rectangle: 247.176,0.635 250.097,3.741
  rectangle: 240.318,-2.286 241.08,0.318
  rectangle: 240.445,-2.413 243.489,0.508
  region: 240.673,1.497 240.318,1.143 240.445,1.016 240.8,1.37
  rectangle: 240.445,1.016 243.747,2.286
  rectangle: 240.43,1.031 243.493,2.921
  region: 240.445,-0.762 240.953,-0.254 239.556,1.143 239.048,0.635
  rectangle: 237.524,0.508 238.006,1.651
  region: 237.783,1.392 237.91,1.519 237.651,1.778 237.524,1.651
  region: 238.006,0.989 237.524,0.508 237.651,0.381 238.133,0.862
  region: 237.556,-0.994 237.91,-0.64 237.651,-0.381 237.297,-0.735
  rectangle: 237.651,0.508 239.302,1.778
  rectangle: 237.651,0.381 239.122,0.762
  rectangle: 237.651,-3.048 239.175,-0.381
  region: 257.344,2.064 256.99,2.418 256.731,2.159 257.085,1.805
  rectangle: 256.985,1.143 257.366,2.54
  rectangle: 253.048,0.889 253.683,2.667
  region: 256.255,-3.153 256.609,-2.799 256.35,-2.54 255.996,-2.894
  rectangle: 255.842,-3.048 260.827,-2.767
  rectangle: 260.922,-3.175 261.557,-0.889
  region: 260.827,-3.026 261.181,-2.672 260.922,-2.413 260.568,-2.767
  rectangle: 250.259,-3.683 261.303,-2.794
  rectangle: 261.181,-3.683 266.764,-0.63
  region: 261.535,-0.984 261.181,-0.63 260.922,-0.889 261.276,-1.243
  region: 255.996,-1.243 256.35,-0.889 255.842,-0.381 255.488,-0.735
  region: 254.223,-0.994 254.577,-0.64 254.318,-0.381 253.964,-0.735
  rectangle: 250.259,-3.683 256.35,-0.889
  region: 253.329,2.386 253.683,2.032 253.942,2.291 253.588,2.645
  region: 260.097,1.333 260.795,0.635 261.054,0.894 260.355,1.592
  region: 253.07,0.984 253.424,0.63 253.683,0.889 253.329,1.243
  rectangle: 257.112,1.016 260.795,3.741
  rectangle: 260.795,0.635 266.637,3.741
  rectangle: 250.259,2.159 266.637,3.741
  rectangle: 250.259,0.635 253.429,3.741
  rectangle: 260.033,-2.159 260.414,0.249
  region: 259.806,-2.059 260.16,-2.413 260.419,-2.154 260.065,-1.8
  region: 260.065,-0.105 260.419,0.249 260.16,0.508 259.806,0.154
  region: 257.339,-1.932 256.985,-2.286 257.112,-2.413 257.466,-2.059
  rectangle: 256.604,-0.254 258.001,0.508
  region: 256.001,1.165 256.355,1.519 256.096,1.778 255.742,1.424
  rectangle: 255.461,0.381 256.35,1.524
  rectangle: 255.789,0.762 255.969,1.778
  rectangle: 255.969,0.762 256.096,1.778
  rectangle: 250,0.635 253.429,3.741
  rectangle: 250,-3.683 254.318,-0.635
  rectangle: 263.462,-3.683 266.764,-0.635
  rectangle: 263.843,0.635 266.764,3.741
  rectangle: 256.985,-2.286 257.747,0.318
  rectangle: 257.112,-2.413 260.155,0.508
  region: 257.339,1.497 256.985,1.143 257.112,1.016 257.466,1.37
  rectangle: 257.112,1.016 260.414,2.286
  rectangle: 257.097,1.031 260.16,2.921
  region: 257.112,-0.762 257.62,-0.254 256.223,1.143 255.715,0.635
  rectangle: 254.191,0.508 254.672,1.651
  region: 254.45,1.392 254.577,1.519 254.318,1.778 254.191,1.651
  region: 254.672,0.989 254.191,0.508 254.318,0.381 254.799,0.862
  region: 254.223,-0.994 254.577,-0.64 254.318,-0.381 253.964,-0.735
  rectangle: 254.318,0.508 255.969,1.778
  rectangle: 254.318,0.381 255.789,0.762
  rectangle: 254.318,-3.048 255.842,-0.381
  region: 274.011,2.064 273.657,2.418 273.398,2.159 273.752,1.805
  rectangle: 273.652,1.143 274.033,2.54
  rectangle: 269.715,0.889 270.35,2.667
  region: 272.921,-3.153 273.276,-2.799 273.017,-2.54 272.663,-2.894
  rectangle: 272.509,-3.048 277.493,-2.767
  rectangle: 277.589,-3.175 278.224,-0.889
  region: 277.493,-3.026 277.848,-2.672 277.589,-2.413 277.235,-2.767
  rectangle: 266.926,-3.683 277.97,-2.794
  rectangle: 277.848,-3.683 283.431,-0.63
  region: 278.202,-0.984 277.848,-0.63 277.589,-0.889 277.943,-1.243
  region: 272.663,-1.243 273.017,-0.889 272.509,-0.381 272.155,-0.735
  region: 270.889,-0.994 271.244,-0.64 270.985,-0.381 270.631,-0.735
  rectangle: 266.926,-3.683 273.017,-0.889
  region: 269.996,2.386 270.35,2.032 270.609,2.291 270.254,2.645
  region: 276.763,1.333 277.462,0.635 277.721,0.894 277.022,1.592
  region: 269.737,0.984 270.091,0.63 270.35,0.889 269.996,1.243
  rectangle: 273.779,1.016 277.462,3.741
  rectangle: 277.462,0.635 283.304,3.741
  rectangle: 266.926,2.159 283.304,3.741
  rectangle: 266.926,0.635 270.096,3.741
  rectangle: 276.7,-2.159 277.081,0.249
  region: 276.473,-2.059 276.827,-2.413 277.086,-2.154 276.731,-1.8
  region: 276.731,-0.105 277.086,0.249 276.827,0.508 276.473,0.154
  region: 274.006,-1.932 273.652,-2.286 273.779,-2.413 274.133,-2.059
  rectangle: 273.271,-0.254 274.668,0.508
  region: 272.667,1.165 273.022,1.519 272.763,1.778 272.409,1.424
  rectangle: 272.128,0.381 273.017,1.524
  rectangle: 272.456,0.762 272.636,1.778
  rectangle: 272.636,0.762 272.763,1.778
  rectangle: 266.667,0.635 270.096,3.741
  rectangle: 266.667,-3.683 270.985,-0.635
  rectangle: 280.129,-3.683 283.431,-0.635
  rectangle: 280.51,0.635 283.431,3.741
  rectangle: 273.652,-2.286 274.414,0.318
  rectangle: 273.779,-2.413 276.822,0.508
  region: 274.006,1.497 273.652,1.143 273.779,1.016 274.133,1.37
  rectangle: 273.779,1.016 277.081,2.286
  rectangle: 273.763,1.031 276.827,2.921
  region: 273.779,-0.762 274.287,-0.254 272.89,1.143 272.382,0.635
  rectangle: 270.858,0.508 271.339,1.651
  region: 271.117,1.392 271.244,1.519 270.985,1.778 270.858,1.651
  region: 271.339,0.989 270.858,0.508 270.985,0.381 271.466,0.862
  region: 270.889,-0.994 271.244,-0.64 270.985,-0.381 270.631,-0.735
  rectangle: 270.985,0.508 272.636,1.778
  rectangle: 270.985,0.381 272.456,0.762
  rectangle: 270.985,-3.048 272.509,-0.381
  region: 290.677,2.064 290.323,2.418 290.064,2.159 290.419,1.805
  rectangle: 290.318,1.143 290.699,2.54
  rectangle: 286.381,0.889 287.016,2.667
  region: 289.588,-3.153 289.942,-2.799 289.683,-2.54 289.329,-2.894
  rectangle: 289.175,-3.048 294.16,-2.767
  rectangle: 294.255,-3.175 294.89,-0.889
  region: 294.16,-3.026 294.514,-2.672 294.255,-2.413 293.901,-2.767
  rectangle: 283.592,-3.683 294.636,-2.794
  rectangle: 294.514,-3.683 300.097,-0.63
  region: 294.868,-0.984 294.514,-0.63 294.255,-0.889 294.61,-1.243
  region: 289.329,-1.243 289.683,-0.889 289.175,-0.381 288.821,-0.735
  region: 287.556,-0.994 287.91,-0.64 287.651,-0.381 287.297,-0.735
  rectangle: 283.592,-3.683 289.683,-0.889
  region: 286.662,2.386 287.016,2.032 287.275,2.291 286.921,2.645
  region: 293.43,1.333 294.128,0.635 294.387,0.894 293.689,1.592
  region: 286.403,0.984 286.758,0.63 287.016,0.889 286.662,1.243
  rectangle: 290.445,1.016 294.128,3.741
  rectangle: 294.128,0.635 299.97,3.741
  rectangle: 283.592,2.159 299.97,3.741
  rectangle: 283.592,0.635 286.762,3.741
  rectangle: 293.366,-2.159 293.747,0.249
  region: 293.139,-2.059 293.493,-2.413 293.752,-2.154 293.398,-1.8
  region: 293.398,-0.105 293.752,0.249 293.493,0.508 293.139,0.154
  region: 290.673,-1.932 290.318,-2.286 290.445,-2.413 290.8,-2.059
  rectangle: 289.937,-0.254 291.334,0.508
  region: 289.334,1.165 289.688,1.519 289.429,1.778 289.075,1.424
  rectangle: 288.794,0.381 289.683,1.524
  rectangle: 289.122,0.762 289.302,1.778
  rectangle: 289.302,0.762 289.429,1.778
  rectangle: 283.333,0.635 286.762,3.741
  rectangle: 283.333,-3.683 287.651,-0.635
  rectangle: 296.795,-3.683 300.097,-0.635
  rectangle: 297.176,0.635 300.097,3.741
  rectangle: 290.318,-2.286 291.08,0.318
  rectangle: 290.445,-2.413 293.489,0.508
  region: 290.673,1.497 290.318,1.143 290.445,1.016 290.8,1.37
  rectangle: 290.445,1.016 293.747,2.286
  rectangle: 290.43,1.031 293.493,2.921
  region: 290.445,-0.762 290.953,-0.254 289.556,1.143 289.048,0.635
  rectangle: 287.524,0.508 288.006,1.651
  region: 287.783,1.392 287.91,1.519 287.651,1.778 287.524,1.651
  region: 288.006,0.989 287.524,0.508 287.651,0.381 288.133,0.862
  region: 287.556,-0.994 287.91,-0.64 287.651,-0.381 287.297,-0.735
  rectangle: 287.651,0.508 289.302,1.778
  rectangle: 287.651,0.381 289.122,0.762
  rectangle: 287.651,-3.048 289.175,-0.381
  region: 307.344,2.064 306.99,2.418 306.731,2.159 307.085,1.805
  rectangle: 306.985,1.143 307.366,2.54
  rectangle: 303.048,0.889 303.683,2.667
  region: 306.255,-3.153 306.609,-2.799 306.35,-2.54 305.996,-2.894
  rectangle: 305.842,-3.048 310.827,-2.767
  rectangle: 310.922,-3.175 311.557,-0.889
  region: 310.827,-3.026 311.181,-2.672 310.922,-2.413 310.568,-2.767
  rectangle: 300.259,-3.683 311.303,-2.794
  rectangle: 311.181,-3.683 316.764,-0.63
  region: 311.535,-0.984 311.181,-0.63 310.922,-0.889 311.276,-1.243
  region: 305.996,-1.243 306.35,-0.889 305.842,-0.381 305.488,-0.735
  region: 304.223,-0.994 304.577,-0.64 304.318,-0.381 303.964,-0.735
  rectangle: 300.259,-3.683 306.35,-0.889
  region: 303.329,2.386 303.683,2.032 303.942,2.291 303.588,2.645
  region: 310.097,1.333 310.795,0.635 311.054,0.894 310.355,1.592
  region: 303.07,0.984 303.424,0.63 303.683,0.889 303.329,1.243
  rectangle: 307.112,1.016 310.795,3.741
  rectangle: 310.795,0.635 316.637,3.741
  rectangle: 300.259,2.159 316.637,3.741
  rectangle: 300.259,0.635 303.429,3.741
  rectangle: 310.033,-2.159 310.414,0.249
  region: 309.806,-2.059 310.16,-2.413 310.419,-2.154 310.065,-1.8
  region: 310.065,-0.105 310.419,0.249 310.16,0.508 309.806,0.154
  region: 307.339,-1.932 306.985,-2.286 307.112,-2.413 307.466,-2.059
  rectangle: 306.604,-0.254 308.001,0.508
  region: 306.001,1.165 306.355,1.519 306.096,1.778 305.742,1.424
  rectangle: 305.461,0.381 306.35,1.524
  rectangle: 305.789,0.762 305.969,1.778
  rectangle: 305.969,0.762 306.096,1.778
  rectangle: 300,0.635 303.429,3.741
  rectangle: 300,-3.683 304.318,-0.635
  rectangle: 313.462,-3.683 316.764,-0.635
  rectangle: 313.843,0.635 316.764,3.741
  rectangle: 306.985,-2.286 307.747,0.318
  rectangle: 307.112,-2.413 310.155,0.508
  region: 307.339,1.497 306.985,1.143 307.112,1.016 307.466,1.37
  rectangle: 307.112,1.016 310.414,2.286
  rectangle: 307.097,1.031 310.16,2.921
  region: 307.112,-0.762 307.62,-0.254 306.223,1.143 305.715,0.635
  rectangle: 304.191,0.508 304.672,1.651
  region: 304.45,1.392 304.577,1.519 304.318,1.778 304.191,1.651
  region: 304.672,0.989 304.191,0.508 304.318,0.381 304.799,0.862
  region: 304.223,-0.994 304.577,-0.64 304.318,-0.381 303.964,-0.735
  rectangle: 304.318,0.508 305.969,1.778
  rectangle: 304.318,0.381 305.789,0.762
  rectangle: 304.318,-3.048 305.842,-0.381
  region: 324.011,2.064 323.657,2.418 323.398,2.159 323.752,1.805
  rectangle: 323.652,1.143 324.033,2.54
  rectangle: 319.715,0.889 320.35,2.667
  region: 322.921,-3.153 323.276,-2.799 323.017,-2.54 322.663,-2.894
  rectangle: 322.509,-3.048 327.493,-2.767
  rectangle: 327.589,-3.175 328.224,-0.889
  region: 327.493,-3.026 327.848,-2.672 327.589,-2.413 327.235,-2.767
  rectangle: 316.926,-3.683 327.97,-2.794
  rectangle: 327.848,-3.683 333.431,-0.63
  region: 328.202,-0.984 327.848,-0.63 327.589,-0.889 327.943,-1.243
  region: 322.663,-1.243 323.017,-0.889 322.509,-0.381 322.155,-0.735
  region: 320.889,-0.994 321.244,-0.64 320.985,-0.381 320.631,-0.735
  rectangle: 316.926,-3.683 323.017,-0.889
  region: 319.996,2.386 320.35,2.032 320.609,2.291 320.254,2.645
  region: 326.763,1.333 327.462,0.635 327.721,0.894 327.022,1.592
  region: 319.737,0.984 320.091,0.63 320.35,0.889 319.996,1.243
  rectangle: 323.779,1.016 327.462,3.741
  rectangle: 327.462,0.635 333.304,3.741
  rectangle: 316.926,2.159 333.304,3.741
  rectangle: 316.926,0.635 320.096,3.741
  rectangle: 326.7,-2.159 327.081,0.249
  region: 326.473,-2.059 326.827,-2.413 327.086,-2.154 326.731,-1.8
  region: 326.731,-0.105 327.086,0.249 326.827,0.508 326.473,0.154
  region: 324.006,-1.932 323.652,-2.286 323.779,-2.413 324.133,-2.059
  rectangle: 323.271,-0.254 324.668,0.508
  region: 322.667,1.165 323.022,1.519 322.763,1.778 322.409,1.424
  rectangle: 322.128,0.381 323.017,1.524
  rectangle: 322.456,0.762 322.636,1.778
  rectangle: 322.636,0.762 322.763,1.778
  rectangle: 316.667,0.635 320.096,3.741
  rectangle: 316.667,-3.683 320.985,-0.635
  rectangle: 330.129,-3.683 333.431,-0.635
  rectangle: 330.51,0.635 333.431,3.741
  rectangle: 323.652,-2.286 324.414,0.318
  rectangle: 323.779,-2.413 326.822,0.508
  region: 324.006,1.497 323.652,1.143 323.779,1.016 324.133,1.37
  rectangle: 323.779,1.016 327.081,2.286
  rectangle: 323.763,1.031 326.827,2.921
  region: 323.779,-0.762 324.287,-0.254 322.89,1.143 322.382,0.635
  rectangle: 320.858,0.508 321.339,1.651
  region: 321.117,1.392 321.244,1.519 320.985,1.778 320.858,1.651
  region: 321.339,0.989 320.858,0.508 320.985,0.381 321.466,0.862
  region: 320.889,-0.994 321.244,-0.64 320.985,-0.381 320.631,-0.735
  rectangle: 320.985,0.508 322.636,1.778
  rectangle: 320.985,0.381 322.456,0.762
  rectangle: 320.985,-3.048 322.509,-0.381
  region: 340.677,2.064 340.323,2.418 340.064,2.159 340.419,1.805
  rectangle: 340.318,1.143 340.699,2.54
  rectangle: 336.381,0.889 337.016,2.667
  region: 339.588,-3.153 339.942,-2.799 339.683,-2.54 339.329,-2.894
  rectangle: 339.175,-3.048 344.16,-2.767
  rectangle: 344.255,-3.175 344.89,-0.889
  region: 344.16,-3.026 344.514,-2.672 344.255,-2.413 343.901,-2.767
  rectangle: 333.592,-3.683 344.636,-2.794
  rectangle: 344.514,-3.683 350.097,-0.63
  region: 344.868,-0.984 344.514,-0.63 344.255,-0.889 344.61,-1.243
  region: 339.329,-1.243 339.683,-0.889 339.175,-0.381 338.821,-0.735
  region: 337.556,-0.994 337.91,-0.64 337.651,-0.381 337.297,-0.735
  rectangle: 333.592,-3.683 339.683,-0.889
  region: 336.662,2.386 337.016,2.032 337.275,2.291 336.921,2.645
  region: 343.43,1.333 344.128,0.635 344.387,0.894 343.689,1.592
  region: 336.403,0.984 336.758,0.63 337.016,0.889 336.662,1.243
  rectangle: 340.445,1.016 344.128,3.741
  rectangle: 344.128,0.635 349.97,3.741
  rectangle: 333.592,2.159 349.97,3.741
  rectangle: 333.592,0.635 336.762,3.741
  rectangle: 343.366,-2.159 343.747,0.249
  region: 343.139,-2.059 343.493,-2.413 343.752,-2.154 343.398,-1.8
  region: 343.398,-0.105 343.752,0.249 343.493,0.508 343.139,0.154
  region: 340.673,-1.932 340.318,-2.286 340.445,-2.413 340.8,-2.059
  rectangle: 339.937,-0.254 341.334,0.508
  region: 339.334,1.165 339.688,1.519 339.429,1.778 339.075,1.424